# Altium PCB PCB1.PcbDoc
Units mil, origin at the board's own origin, x right, y up, seen from the top; angles counter-clockwise.
Board outline 6000 x 4000 mil, 2 copper layers (Top Layer, Bottom Layer); 13 components, 0 nets, 26 pads, 0 vias.
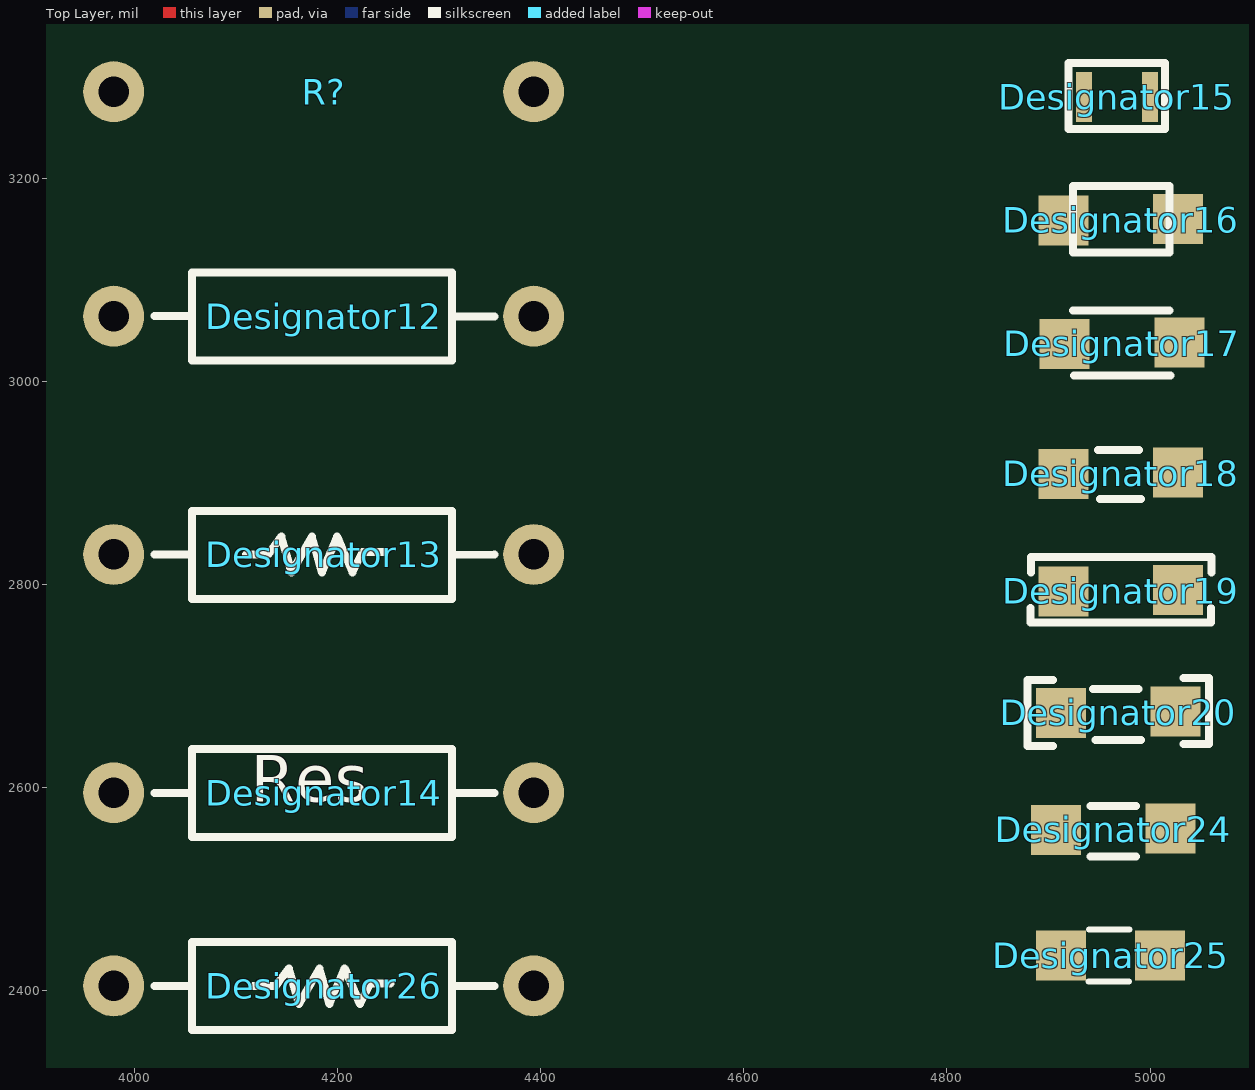
[diagram p0: Top Layer view]
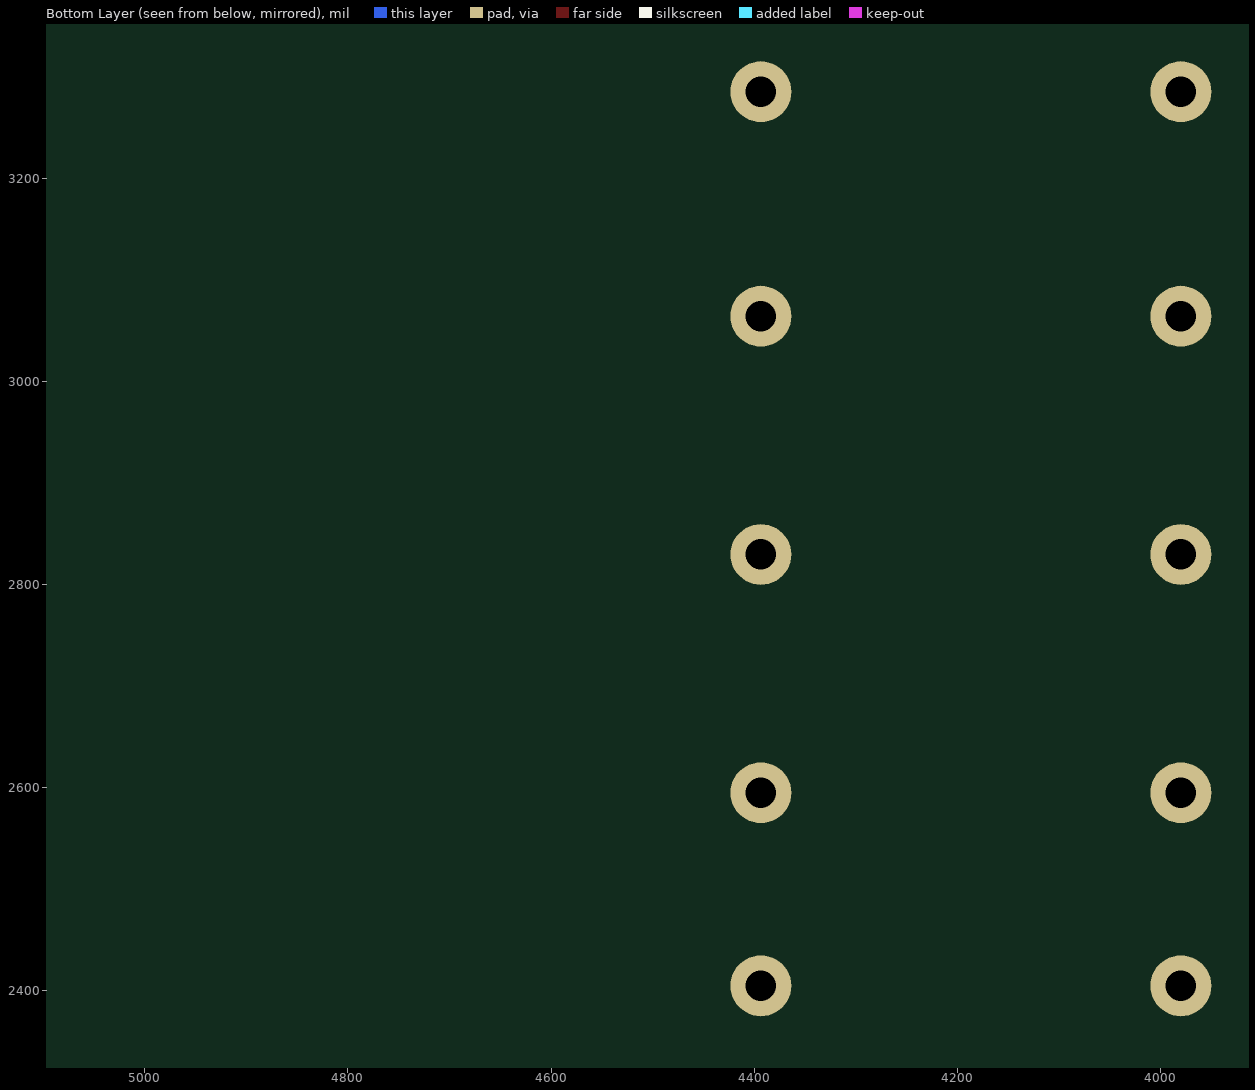
[diagram p1: Bottom Layer view, seen from below]

## Layer stack, top to bottom
Top Solder: solder mask 0.4, Solder Resist, Dk 3.5
Top Layer: signal copper 1.4
Dielectric 1: dielectric 12.6, FR-4, Dk 4.8
Bottom Layer: signal copper 1.4
Bottom Solder: solder mask 0.4, Solder Resist, Dk 3.5

## Board outline
1000,1000 7000,1000 7000,5000 1000,5000

## Design rules (kind name [scope] priority, off if disabled: settings)
Clearance [All] p1: gap=10 ignorepadtopadclearanceinfootprint=FALSE
PolygonConnect [All] p1: connectstyle=Relief reliefconductorwidth=10 reliefentries=4 polygonreliefangle="90 Angle" airgapwidth=10
RoutingVias [All] p1: holewidth=28 width=50 viastyle="Through Hole" minholewidth=28 minwidth=50 maxholewidth=28 maxwidth=50
SolderMaskExpansion [All] p1: expansion=4 istentingtop=FALSE
Width [All] p1: maxlimit=10 minlimit=10 preferedwidth=10
30 further rules are at their usual default settings.

## Classes and differential pairs
component class Sheet1: R?

## Components (designator, comment, footprint, x,y, rotation, side; value= is the part's Value field where it differs from the comment)
Designator12 "Comment" Res_THT_1/4 3980,3064.05 r0 top
Designator13 "Comment" Res_THT_1/4 3980,2829.53 r0 top
Designator14 "Comment" Res_THT_1/4 3980,2595 r0 top
Designator15 "Comment" Res_SMD_0805#1 4899.85,3278.5 r0 top
Designator16 "Comment" Res_SMD_0805#2 4903.98,3156.98 r0 top
Designator17 "Comment" Res_SMD_0805#2 4905,3035.46 r0 top
Designator18 "Comment" Res_SMD_0805#2 4903.98,2907.33 r0 top
Designator19 "Comment" Res_SMD_0805#2 4903.98,2791.81 r0 top
Designator20 "Comment" Res_SMD_0805#2 4901.24,2672.09 r0 top
Designator24 "Comment" Res_SMD_0805#2 4896.24,2557.09 r0 top
Designator25 "Comment" Res_SMD_0805#3 4894.82,2433.33 r0 top
Designator26 "Comment" Res_THT_1/4 3980,2405 r0 top
R? "Res_THT" Res_THT_1/4 3980,3285 r0 top

## Footprints (in the part's own frame and the unit in brackets; to place one, negate y for a bottom-side part, rotate by r counter-clockwise, add the part's x,y. Pads: shape width x height; smd on the part's side, far side on the other; paste and mask are expansions set on the pad)
Res_SMD_0805#1 [mm]
  rect 0.4x1.25 smd: 1(0.889,0.035) 2(2.544,0.038)
  silkscreen extent 0.51,-0.76 2.92,0.89
Res_SMD_0805#2 [mm]
  rect 1.25x1.25 smd: 1(0.28,0.033) 2(3.143,0.074)
  silkscreen extent 0.51,-0.76 2.92,0.89
Res_SMD_0805#3 [mm]
  rect 1.25x1.25 smd: 1(0.447,0.035) 2(2.926,0.043)
  silkscreen extent 1.13,-0.61 2.16,0.68, body extent 0.68,-0.59 2.71,0.68, height 0.6
Res_THT_1/4 [mil]
  round 60 hole 30: 1(0,0) 2(413.39,0)
  silkscreen extent 40,-44 375,43

## Nets (pads, with @x,y where several pads share a name; then routed paths per layer and width w, separated by ;. In a path a pad name is that pad's centre, name@x,y a point inside that pad or via, vN(x,y) a via of type N, cw(c..) or ccw(c..) an arc to the next point about the centre after c; other vN are vias at no path point)
pads on no net: Designator12.1 Designator12.2 Designator13.1 Designator13.2 Designator14.1 Designator14.2 Designator15.1 Designator15.2 Designator16.1 Designator16.2 Designator17.1 Designator17.2 Designator18.1 Designator18.2 Designator19.1 Designator19.2 Designator20.1 Designator20.2 Designator24.1 Designator24.2 Designator25.1 Designator25.2 Designator26.1 Designator26.2 R?.1 R?.2

## Silkscreen, mask and mechanical layers (free items; w line width, h text height)
Top Overlay:
  text "Res" at 5115,2885.8 h78.74
  text "Cap" at 5115,2768.77 h78.74
  text "Ind" at 5115,2645.8 h78.74

## Text inside footprints (layer, text, board x,y; h text height)
Designator14: Top Overlay "Res" at 4115,2570.8 h78.74